# Altium PCB fpga.PcbDoc (part 6 of 6)
Units mm, origin at the board's own origin, x right, y up, seen from the top; angles counter-clockwise.
Board outline 111.63 x 111 mm, 2 copper layers (Top Layer, Bottom Layer); 5 components, 0 nets, 896 pads, 0 vias.
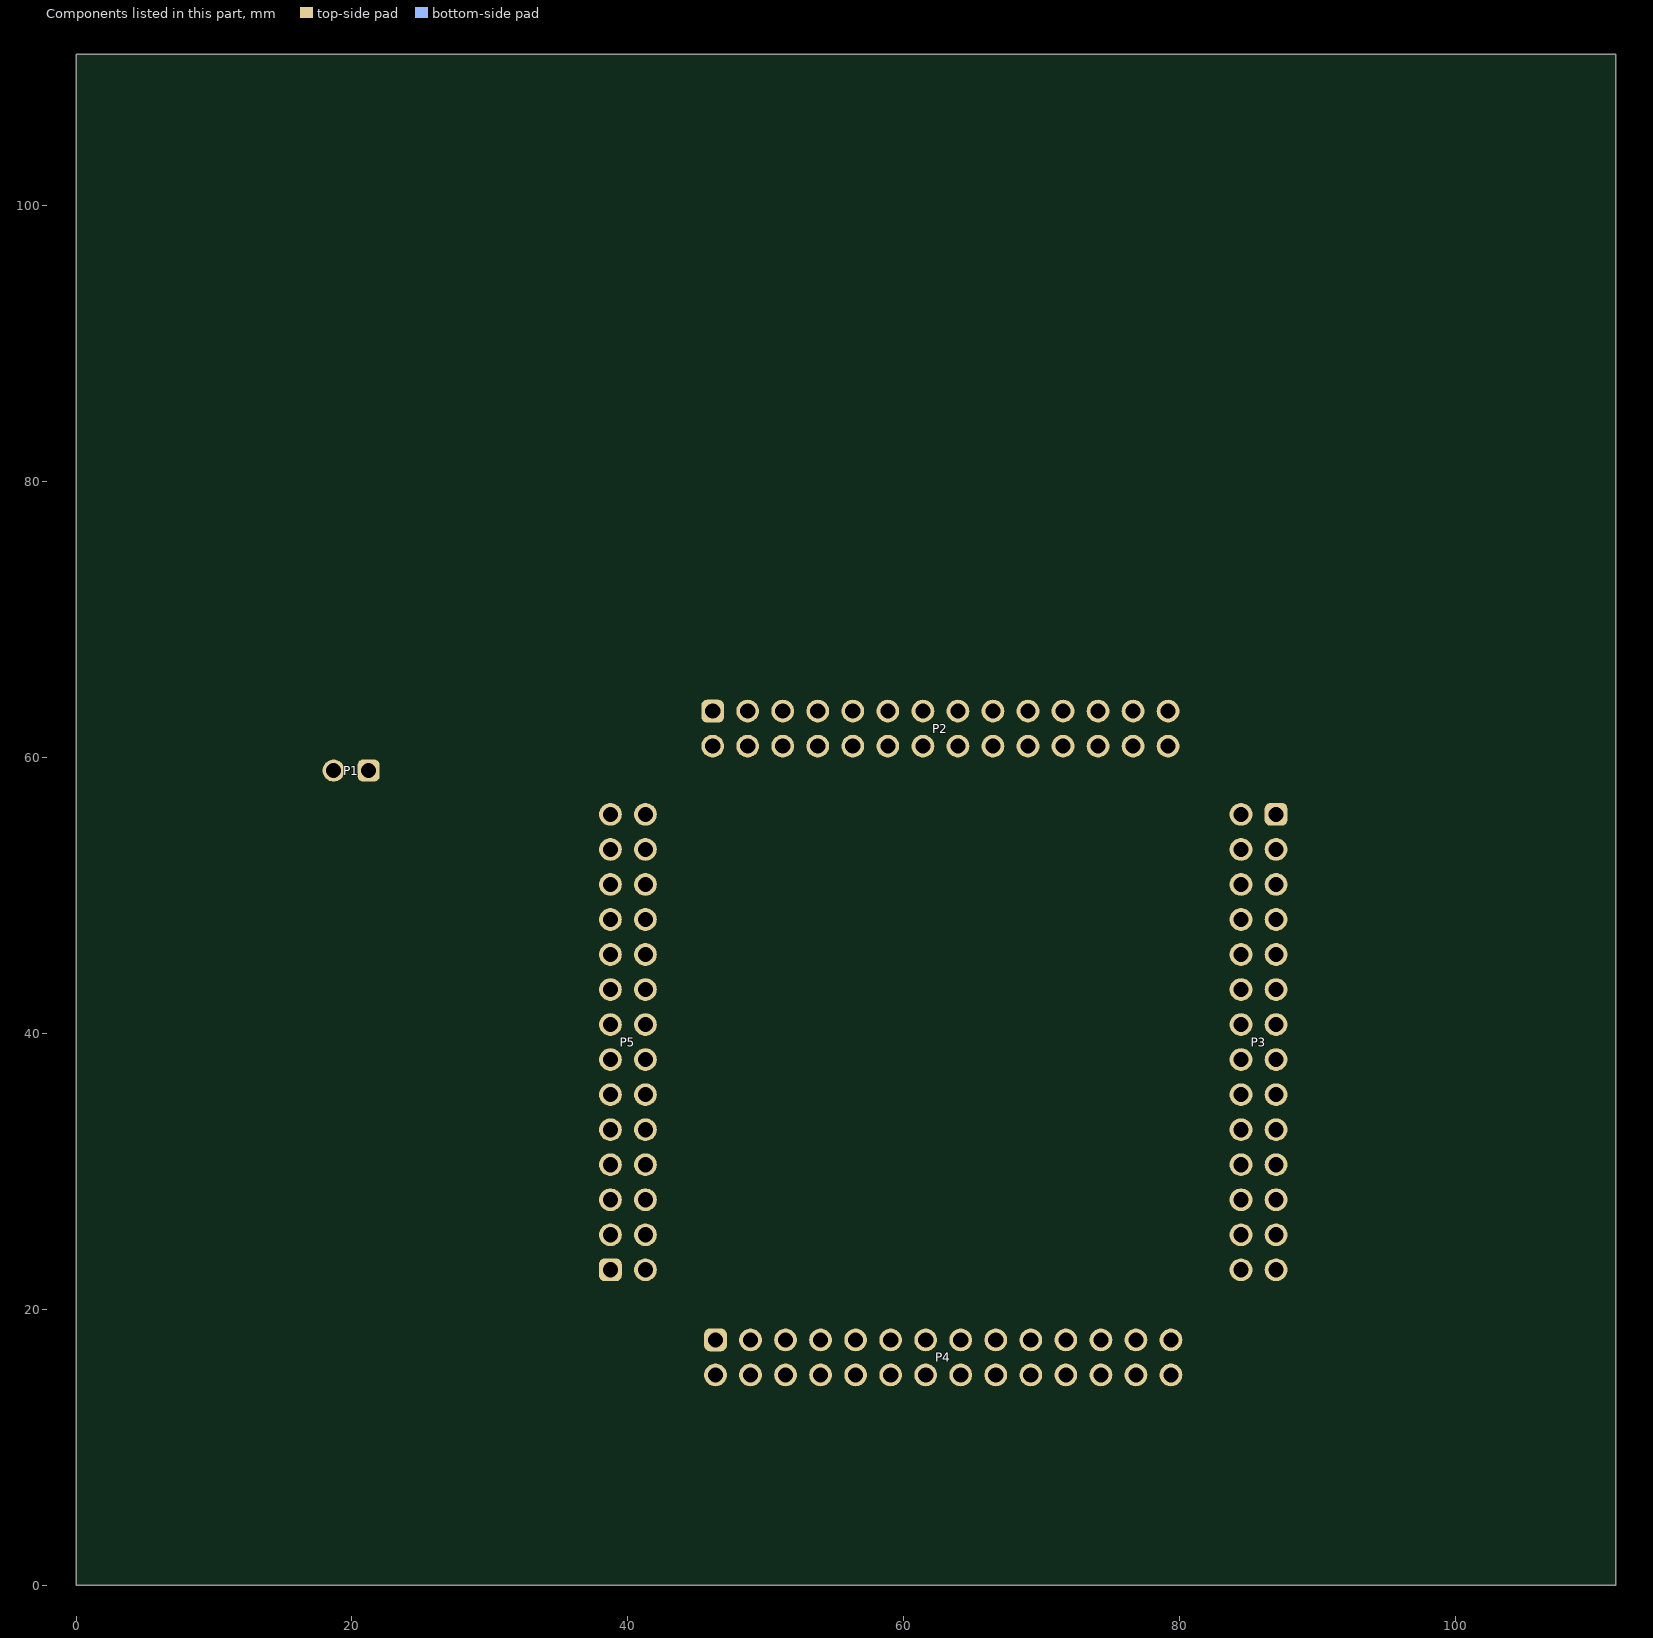
[diagram p6: the components of this part, seen from the top]

## Nets (pads, with @x,y where several pads share a name; then routed paths per layer and width w, separated by ;. In a path a pad name is that pad's centre, name@x,y a point inside that pad or via, vN(x,y) a via of type N, cw(c..) or ccw(c..) an arc to the next point about the centre after c; other vN are vias at no path point) (continued)
copper on no net: (continued)
  Top Layer w0.027: 14.647,22.595 14.672,22.57 ; 14.647,22.645 14.672,22.67 ; 14.647,22.645 14.672,22.62 ; 14.647,22.745 14.672,22.77 ; 14.647,22.745 14.672,22.72 ; 14.647,22.795 14.672,22.82 ; 14.647,22.795 14.672,22.77 ; 14.647,22.895 14.672,22.92 ; 14.647,22.895 14.672,22.87 ; 14.647,22.945 14.672,22.97 ; 14.647,22.945 14.672,22.92 ; 14.647,23.045 14.672,23.07 ; 14.647,23.045 14.672,23.02 ; 14.647,23.095 14.672,23.12 ; 14.647,23.095 14.672,23.07 ; 14.647,23.195 14.672,23.22 ; 14.647,23.195 14.672,23.17 ; 14.647,23.245 14.672,23.27 ; 14.647,23.245 14.672,23.22 ; 14.647,23.345 14.672,23.37 ; 14.647,23.345 14.672,23.32 ; 14.647,23.395 14.672,23.42 ; 14.647,23.395 14.672,23.37 ; 14.647,23.495 14.672,23.52 ; 14.647,23.495 14.672,23.47 ; 14.647,23.545 14.672,23.57 ; 14.647,23.545 14.672,23.52 ; 14.647,23.645 14.672,23.67 ; 14.647,23.645 14.672,23.62 ; 14.647,23.695 14.672,23.72 ; 14.647,23.695 14.672,23.67 ; 14.647,23.795 14.672,23.82 ; 14.647,23.795 14.672,23.77 ; 14.647,23.845 14.672,23.87 ; 14.647,23.845 14.672,23.82 ; 14.647,23.945 14.672,23.97 ; 14.647,23.945 14.672,23.92 ; 14.647,23.995 14.672,24.02 ; 14.647,23.995 14.672,23.97 ; 14.647,24.095 14.672,24.12 ; 14.647,24.095 14.672,24.07 ; 14.647,24.145 14.672,24.17 ; 14.647,24.145 14.672,24.12 ; 14.647,24.245 14.672,24.27 ; 14.647,24.245 14.672,24.22 ; 14.647,24.295 14.672,24.32 ; 14.647,24.295 14.672,24.27 ; 14.647,24.395 14.672,24.42 ; 14.647,24.395 14.672,24.37 ; 14.647,24.445 14.672,24.47 ; 14.647,24.445 14.672,24.42 ; 14.647,24.545 14.672,24.57 ; 14.647,24.545 14.672,24.52 ; 14.647,24.595 14.672,24.62 ; 14.647,24.595 14.672,24.57 ; 14.647,24.695 14.672,24.72 ; 14.647,24.695 14.672,24.67 ; 14.647,24.745 14.672,24.77 ; 14.647,24.745 14.672,24.72 ; 14.647,24.845 14.672,24.87 ; 14.647,24.845 14.672,24.82 ; 14.647,24.895 14.672,24.92 ; 14.647,24.895 14.672,24.87 ; 14.647,24.995 14.672,25.02 ; 14.647,24.995 14.672,24.97 ; 14.647,25.045 14.672,25.07 ; 14.647,25.045 14.672,25.02 ; 14.647,25.145 14.672,25.17 ; 14.647,25.145 14.672,25.12 ; 14.647,25.195 14.672,25.22 ; 14.647,25.195 14.672,25.17 ; 14.647,25.295 14.672,25.32 ; 14.647,25.295 14.672,25.27 ; 14.647,25.345 14.672,25.37 ; 14.647,25.345 14.672,25.32 ; 14.647,25.445 14.672,25.47 ; 14.647,25.445 14.672,25.42 ; 14.647,25.495 14.672,25.52 ; 14.647,25.495 14.672,25.47 ; 14.647,25.595 14.672,25.62 ; 14.647,25.595 14.672,25.57 ; 14.647,25.645 14.672,25.67 ; 14.647,25.645 14.672,25.62 ; 14.647,25.745 14.672,25.77 ; 14.647,25.745 14.672,25.72 ; 14.647,25.795 14.672,25.82 ; 14.647,25.795 14.672,25.77 ; 14.647,25.895 14.672,25.92 ; 14.647,25.895 14.672,25.87 ; 14.647,25.945 14.672,25.97 ; 14.647,25.945 14.672,25.92 ; 14.647,26.045 14.672,26.07 ; 14.647,26.045 14.672,26.02 ; 14.647,26.095 14.672,26.12 ; 14.647,26.095 14.672,26.07 ; 14.647,26.195 14.672,26.22 ; 14.647,26.195 14.672,26.17 ; 14.647,26.245 14.672,26.27 ; 14.647,26.245 14.672,26.22 ; 14.647,26.345 14.672,26.37 ; 14.647,26.345 14.672,26.32 ; 14.647,26.395 14.672,26.42 ; 14.647,26.395 14.672,26.37 ; 14.647,26.495 14.672,26.52 ; 14.647,26.495 14.672,26.47 ; 14.647,26.545 14.672,26.57 ; 14.647,26.545 14.672,26.52 ; 14.647,26.645 14.672,26.67 ; 14.647,26.645 14.672,26.62 ; 14.647,26.695 14.672,26.72 ; 14.647,26.695 14.672,26.67 ; 14.647,26.795 14.672,26.82 ; 14.647,26.795 14.672,26.77 ; 14.647,26.845 14.672,26.87 ; 14.647,26.845 14.672,26.82 ; 14.647,26.945 14.672,26.97 ; 14.647,26.945 14.672,26.92 ; 14.647,26.995 14.672,27.02 ; 14.647,26.995 14.672,26.97 ; 14.647,27.095 14.672,27.12 ; 14.647,27.095 14.672,27.07 ; 14.647,27.145 14.672,27.17 ; 14.647,27.145 14.672,27.12 ; 14.647,27.245 14.672,27.27 ; 14.647,27.245 14.672,27.22 ; 14.647,27.295 14.672,27.32 ; 14.647,27.295 14.672,27.27 ; 14.647,27.395 14.672,27.42 ; 14.647,27.395 14.672,27.37 ; 14.647,27.445 14.672,27.47 ; 14.647,27.445 14.672,27.42 ; 14.647,27.545 14.672,27.57 ; 14.647,27.545 14.672,27.52 ; 14.647,27.595 14.672,27.62 ; 14.647,27.595 14.672,27.57 ; 14.647,27.695 14.672,27.72 ; 14.647,27.695 14.672,27.67 ; 14.647,27.745 14.672,27.77 ; 14.647,27.745 14.672,27.72 ; 14.647,27.845 14.672,27.87 ; 14.647,27.845 14.672,27.82 ; 14.647,27.895 14.672,27.92 ; 14.647,27.895 14.672,27.87 ; 14.647,27.995 14.672,28.02 ; 14.647,27.995 14.672,27.97 ; 14.647,28.045 14.672,28.07 ; 14.647,28.045 14.672,28.02 ; 14.647,28.145 14.672,28.17 ; 14.647,28.145 14.672,28.12 ; 14.647,28.195 14.672,28.22 ; 14.647,28.195 14.672,28.17 ; 14.647,28.295 14.672,28.32 ; 14.647,28.295 14.672,28.27 ; 14.647,28.345 14.672,28.37 ; 14.647,28.345 14.672,28.32 ; 14.647,28.445 14.672,28.47 ; 14.647,28.445 14.672,28.42 ; 14.647,28.495 14.672,28.52 ; 14.647,28.495 14.672,28.47 ; 14.647,28.595 14.672,28.62 ; 14.647,28.595 14.672,28.57 ; 14.647,28.645 14.672,28.67 ; 14.647,28.645 14.672,28.62 ; 14.647,28.745 14.672,28.77 ; 14.647,28.745 14.672,28.72 ; 14.647,28.795 14.672,28.82 ; 14.647,28.795 14.672,28.77 ; 14.647,28.895 14.672,28.92 ; 14.647,28.895 14.672,28.87 ; 14.647,28.945 14.672,28.97 ; 14.647,28.945 14.672,28.92 ; 14.647,29.045 14.672,29.07 ; 14.647,29.045 14.672,29.02 ; 14.647,29.095 14.672,29.12 ; 14.647,29.095 14.672,29.07 ; 14.647,29.195 14.672,29.22 ; 14.647,29.195 14.672,29.17 ; 14.647,29.245 14.672,29.27 ; 14.647,29.245 14.672,29.22 ; 14.647,29.345 14.672,29.37 ; 14.647,29.345 14.672,29.32 ; 14.647,29.395 14.672,29.42 ; 14.647,29.395 14.672,29.37 ; 14.647,29.495 14.672,29.52 ; 14.647,29.495 14.672,29.47 ; 14.647,29.545 14.672,29.57 ; 14.647,29.545 14.672,29.52 ; 14.647,29.645 14.672,29.67 ; 14.647,29.645 14.672,29.62 ; 14.647,29.695 14.672,29.72 ; 14.647,29.695 14.672,29.67 ; 14.647,29.795 14.672,29.82 ; 14.647,29.795 14.672,29.77 ; 14.647,29.845 14.672,29.87 ; 14.647,29.845 14.672,29.82 ; 14.647,29.945 14.672,29.97 ; 14.647,29.945 14.672,29.92 ; 14.647,29.995 14.672,30.02 ; 14.647,29.995 14.672,29.97 ; 14.647,30.095 14.672,30.12 ; 14.647,30.095 14.672,30.07 ; 14.647,30.145 14.672,30.17 ; 14.647,30.145 14.672,30.12 ; 14.647,30.245 14.672,30.27 ; 14.647,30.245 14.672,30.22 ; 14.647,30.295 14.672,30.32 ; 14.647,30.295 14.672,30.27 ; 14.647,30.395 14.672,30.42 ; 14.647,30.395 14.672,30.37 ; 14.647,30.445 14.672,30.47 ; 14.647,30.445 14.672,30.42 ; 14.647,30.545 14.672,30.57 ; 14.647,30.545 14.672,30.52 ; 14.647,30.595 14.672,30.62 ; 14.647,30.595 14.672,30.57 ; 14.647,30.695 14.672,30.72 ; 14.647,30.695 14.672,30.67 ; 14.647,30.745 14.672,30.77 ; 14.647,30.745 14.672,30.72 ; 14.647,30.845 14.672,30.87 ; 14.647,30.845 14.672,30.82 ; 14.647,30.895 14.672,30.92 ; 14.647,30.895 14.672,30.87 ; 14.647,30.995 14.672,31.02 ; 14.647,30.995 14.672,30.97 ; 14.647,31.045 14.672,31.07 ; 14.647,31.045 14.672,31.02 ; 14.647,31.145 14.672,31.17 ; 14.647,31.145 14.672,31.12 ; 14.647,31.195 14.672,31.22 ; 14.647,31.195 14.672,31.17 ; 14.647,31.295 14.672,31.32 ; 14.647,31.295 14.672,31.27 ; 14.647,31.345 14.672,31.37 ; 14.647,31.345 14.672,31.32 ; 14.647,31.445 14.672,31.47 ; 14.647,31.445 14.672,31.42 ; 14.647,31.495 14.672,31.52 ; 14.647,31.495 14.672,31.47 ; 14.647,31.595 14.672,31.62 ; 14.647,31.595 14.672,31.57 ; 14.647,31.645 14.672,31.67 ; 14.647,31.645 14.672,31.62 ; 14.647,31.745 14.672,31.77 ; 14.647,31.745 14.672,31.72 ; 14.647,31.795 14.672,31.82 ; 14.647,31.795 14.672,31.77 ; 14.647,31.895 14.672,31.92 ; 14.647,31.895 14.672,31.87 ; 14.647,31.945 14.672,31.97 ; 14.647,31.945 14.672,31.92 ; 14.647,32.045 14.672,32.07 ; 14.647,32.045 14.672,32.02 ; 14.647,32.095 14.672,32.12 ; 14.647,32.095 14.672,32.07 ; 14.647,32.195 14.672,32.22 ; 14.647,32.195 14.672,32.17 ; 14.647,32.245 14.672,32.27 ; 14.647,32.245 14.672,32.22 ; 14.647,32.345 14.672,32.37 ; 14.647,32.345 14.672,32.32 ; 14.647,32.395 14.672,32.42 ; 14.647,32.395 14.672,32.37 ; 14.647,32.495 14.672,32.52 ; 14.647,32.495 14.672,32.47 ; 14.647,32.545 14.672,32.57 ; 14.647,32.545 14.672,32.52 ; 14.647,32.645 14.672,32.67 ; 14.647,32.645 14.672,32.62 ; 14.647,32.695 14.672,32.72 ; 14.647,32.695 14.672,32.67 ; 14.647,32.795 14.672,32.82 ; 14.647,32.795 14.672,32.77 ; 14.647,32.845 14.672,32.87 ; 14.647,32.845 14.672,32.82 ; 14.647,32.945 14.672,32.97 ; 14.647,32.945 14.672,32.92 ; 14.647,32.995 14.672,33.02 ; 14.647,32.995 14.672,32.97 ; 14.647,33.095 14.672,33.12 ; 14.647,33.095 14.672,33.07 ; 14.647,33.145 14.672,33.17 ; 14.647,33.145 14.672,33.12 ; 14.647,33.245 14.672,33.27 ; 14.647,33.245 14.672,33.22 ; 14.647,33.295 14.672,33.32 ; 14.647,33.295 14.672,33.27 ; 14.647,33.395 14.672,33.42 ; 14.647,33.395 14.672,33.37 ; 14.647,33.445 14.672,33.47 ; 14.647,33.445 14.672,33.42 ; 14.647,33.545 14.672,33.57 ; 14.647,33.545 14.672,33.52 ; 14.647,33.595 14.672,33.62 ; 14.647,33.595 14.672,33.57 ; 14.647,33.695 14.672,33.72 ; 14.647,33.695 14.672,33.67 ; 14.647,33.745 14.672,33.77 ; 14.647,33.745 14.672,33.72 ; 14.647,33.845 14.672,33.87 ; 14.647,33.845 14.672,33.82 ; 14.647,33.895 14.672,33.92 ; 14.647,33.895 14.672,33.87 ; 14.647,33.995 14.672,34.02 ; 14.647,33.995 14.672,33.97 ; 14.647,34.045 14.672,34.07 ; 14.647,34.045 14.672,34.02 ; 14.647,34.145 14.672,34.17 ; 14.647,34.145 14.672,34.12 ; 14.647,34.195 14.672,34.22 ; 14.647,34.195 14.672,34.17 ; 14.647,34.295 14.672,34.32 ; 14.647,34.295 14.672,34.27 ; 14.647,34.345 14.672,34.37 ; 14.647,34.345 14.672,34.32 ; 14.647,34.445 14.672,34.47 ; 14.647,34.445 14.672,34.42 ; 14.647,34.495 14.672,34.52 ; 14.647,34.495 14.672,34.47 ; 14.647,34.595 14.672,34.62 ; 14.647,34.595 14.672,34.57 ; 14.647,34.645 14.672,34.67 ; 14.647,34.645 14.672,34.62 ; 14.647,34.745 14.672,34.77 ; 14.647,34.745 14.672,34.72 ; 14.647,34.795 14.672,34.82 ; 14.647,34.795 14.672,34.77 ; 14.647,34.895 14.672,34.92 ; 14.647,34.895 14.672,34.87 ; 14.647,34.945 14.672,34.97 ; 14.647,34.945 14.672,34.92 ; 14.647,35.045 14.672,35.07 ; 14.647,35.045 14.672,35.02 ; 14.647,35.095 14.672,35.12 ; 14.647,35.095 14.672,35.07 ; 14.647,35.195 14.672,35.22 ; 14.647,35.195 14.672,35.17 ; 14.647,35.245 14.672,35.27 ; 14.647,35.245 14.672,35.22 ; 14.647,35.345 14.672,35.37 ; 14.647,35.345 14.672,35.32 ; 14.647,35.395 14.672,35.42 ; 14.647,35.395 14.672,35.37 ; 14.647,35.495 14.672,35.52 ; 14.647,35.495 14.672,35.47 ; 14.647,35.545 14.672,35.57 ; 14.647,35.545 14.672,35.52 ; 14.647,35.645 14.672,35.67 ; 14.647,35.645 14.672,35.62 ; 14.647,35.695 14.672,35.72 ; 14.647,35.695 14.672,35.67 ; 14.647,35.795 14.672,35.82 ; 14.647,35.795 14.672,35.77 ; 14.647,35.845 14.672,35.87 ; 14.647,35.845 14.672,35.82 ; 14.647,35.945 14.672,35.97 ; 14.647,35.945 14.672,35.92 ; 14.647,35.995 14.672,36.02 ; 14.647,35.995 14.672,35.97 ; 14.647,36.095 14.672,36.12 ; 14.647,36.095 14.672,36.07 ; 14.647,36.145 14.672,36.17 ; 14.647,36.145 14.672,36.12 ; 14.647,36.245 14.672,36.27 ; 14.647,36.245 14.672,36.22 ; 14.647,36.295 14.672,36.32 ; 14.647,36.295 14.672,36.27 ; 14.647,36.395 14.672,36.42 ; 14.647,36.395 14.672,36.37 ; 14.647,36.445 14.672,36.47 ; 14.647,36.445 14.672,36.42 ; 14.647,36.545 14.672,36.57 ; 14.647,36.545 14.672,36.52 ; 14.647,36.595 14.672,36.62 ; 14.647,36.595 14.672,36.57 ; 14.647,36.695 14.672,36.72 ; 14.647,36.695 14.672,36.67 ; 14.647,36.745 14.672,36.77 ; 14.647,36.745 14.672,36.72 ; 14.647,36.845 14.672,36.87 ; 14.647,36.845 14.672,36.82 ; 14.647,36.895 14.672,36.92 ; 14.647,36.895 14.672,36.87 ; 14.647,36.995 14.672,37.02 ; 14.647,36.995 14.672,36.97 ; 14.647,37.045 14.672,37.07 ; 14.647,37.045 14.672,37.02 ; 14.647,37.145 14.672,37.17 ; 14.647,37.145 14.672,37.12 ; 14.647,37.195 14.672,37.22 ; 14.647,37.195 14.672,37.17 ; 14.647,37.295 14.672,37.32 ; 14.647,37.295 14.672,37.27 ; 14.647,37.345 14.672,37.37 ; 14.647,37.345 14.672,37.32 ; 14.647,37.445 14.672,37.47 ; 14.647,37.445 14.672,37.42 ; 14.647,37.495 14.672,37.52 ; 14.647,37.495 14.672,37.47 ; 14.647,37.595 14.672,37.62 ; 14.647,37.595 14.672,37.57 ; 14.647,37.645 14.672,37.67 ; 14.647,37.645 14.672,37.62 ; 14.647,37.745 14.672,37.77 ; 14.647,37.745 14.672,37.72 ; 14.647,37.795 14.672,37.82 ; 14.647,37.795 14.672,37.77 ; 14.647,37.895 14.672,37.92 ; 14.647,37.895 14.672,37.87 ; 14.647,37.945 14.672,37.97 ; 14.647,37.945 14.672,37.92 ; 14.647,38.045 14.672,38.07 ; 14.647,38.045 14.672,38.02 ; 14.647,38.095 14.672,38.12 ; 14.647,38.095 14.672,38.07 ; 14.647,38.195 14.672,38.22 ; 14.647,38.195 14.672,38.17 ; 14.647,38.245 14.672,38.27 ; 14.647,38.245 14.672,38.22 ; 14.647,38.345 14.672,38.37 ; 14.647,38.345 14.672,38.32 ; 14.647,38.395 14.672,38.42 ; 14.647,38.395 14.672,38.37 ; 14.647,38.495 14.672,38.52 ; 14.647,38.495 14.672,38.47 ; 14.647,38.545 14.672,38.57 ; 14.647,38.545 14.672,38.52 ; 14.647,38.645 14.672,38.67 ; 14.647,38.645 14.672,38.62 ; 14.647,38.695 14.672,38.72 ; 14.647,38.695 14.672,38.67 ; 14.647,38.795 14.672,38.82 ; 14.647,38.795 14.672,38.77 ; 14.647,38.845 14.672,38.87 ; 14.647,38.845 14.672,38.82 ; 14.647,38.945 14.672,38.97 ; 14.647,38.945 14.672,38.92 ; 14.647,38.995 14.672,39.02 ; 14.647,38.995 14.672,38.97 ; 14.647,39.095 14.672,39.12 ; 14.647,39.095 14.672,39.07 ; 14.647,39.145 14.672,39.17 ; 14.647,39.145 14.672,39.12 ; 14.647,39.245 14.672,39.27 ; 14.647,39.245 14.672,39.22 ; 14.647,39.295 14.672,39.32 ; 14.647,39.295 14.672,39.27 ; 14.647,39.395 14.672,39.42 ; 14.647,39.395 14.672,39.37 ; 14.647,39.445 14.672,39.47 ; 14.647,39.445 14.672,39.42 ; 14.647,39.545 14.672,39.57 ; 14.647,39.545 14.672,39.52 ; 14.647,39.595 14.672,39.62 ; 14.647,39.595 14.672,39.57 ; 14.647,39.695 14.672,39.72 ; 14.647,39.695 14.672,39.67 ; 14.647,39.745 14.672,39.77 ; 14.647,39.745 14.672,39.72 ; 14.647,39.845 14.672,39.87 ; 14.647,39.845 14.672,39.82 ; 14.647,39.895 14.672,39.92 ; 14.647,39.895 14.672,39.87 ; 14.647,39.995 14.672,40.02 ; 14.647,39.995 14.672,39.97 ; 14.647,40.045 14.672,40.07 ; 14.647,40.045 14.672,40.02 ; 14.647,40.145 14.672,40.17 ; 14.647,40.145 14.672,40.12 ; 14.647,40.195 14.672,40.22 ; 14.647,40.195 14.672,40.17 ; 14.647,40.295 14.672,40.32 ; 14.647,40.295 14.672,40.27 ; 14.647,40.345 14.672,40.37 ; 14.647,40.345 14.672,40.32 ; 14.647,40.445 14.672,40.47 ; 14.647,40.445 14.672,40.42 ; 14.647,40.495 14.672,40.52 ; 14.647,40.495 14.672,40.47 ; 14.647,40.595 14.672,40.62 ; 14.647,40.595 14.672,40.57 ; 14.647,40.645 14.672,40.67 ; 14.647,40.645 14.672,40.62 ; 14.647,40.745 14.672,40.77 ; 14.647,40.745 14.672,40.72 ; 14.647,40.795 14.672,40.82 ; 14.647,40.795 14.672,40.77 ; 14.647,40.895 14.672,40.92 ; 14.647,40.895 14.672,40.87 ; 14.647,40.945 14.672,40.97 ; 14.647,40.945 14.672,40.92 ; 14.647,41.045 14.672,41.07 ; 14.647,41.045 14.672,41.02 ; 14.647,41.095 14.672,41.12 ; 14.647,41.095 14.672,41.07 ; 14.647,41.195 14.672,41.22 ; 14.647,41.195 14.672,41.17 ; 14.647,41.245 14.672,41.27 ; 14.647,41.245 14.672,41.22 ; 14.647,41.345 14.672,41.37 ; 14.647,41.345 14.672,41.32 ; 14.647,41.395 14.672,41.42 ; 14.647,41.395 14.672,41.37 ; 14.647,41.495 14.672,41.52 ; 14.647,41.495 14.672,41.47 ; 14.647,41.545 14.672,41.57 ; 14.647,41.545 14.672,41.52 ; 14.647,41.645 14.672,41.67 ; 14.647,41.645 14.672,41.62 ; 14.647,41.695 14.672,41.72 ; 14.647,41.695 14.672,41.67 ; 14.647,41.795 14.672,41.82 ; 14.647,41.795 14.672,41.77 ; 14.647,41.845 14.672,41.87 ; 14.647,41.845 14.672,41.82 ; 14.647,41.945 14.672,41.97 ; 14.647,41.945 14.672,41.92 ; 14.647,41.995 14.672,42.02 ; 14.647,41.995 14.672,41.97 ; 14.647,42.095 14.672,42.12 ; 14.647,42.095 14.672,42.07 ; 14.647,42.145 14.672,42.17 ; 14.647,42.145 14.672,42.12 ; 14.647,42.245 14.672,42.27 ; 14.647,42.245 14.672,42.22 ; 14.647,42.295 14.672,42.32 ; 14.647,42.295 14.672,42.27 ; 14.647,42.395 14.672,42.42 ; 14.647,42.395 14.672,42.37 ; 14.647,42.445 14.672,42.47 ; 14.647,42.445 14.672,42.42 ; 14.647,42.545 14.672,42.57 ; 14.647,42.545 14.672,42.52 ; 14.647,42.595 14.672,42.62 ; 14.647,42.595 14.672,42.57 ; 14.647,42.695 14.672,42.72 ; 14.647,42.695 14.672,42.67 ; 14.647,42.745 14.672,42.77 ; 14.647,42.745 14.672,42.72 ; 14.647,42.845 14.672,42.87 ; 14.647,42.845 14.672,42.82 ; 14.647,42.895 14.672,42.92 ; 14.647,42.895 14.672,42.87 ; 14.647,42.995 14.672,43.02 ; 14.647,42.995 14.672,42.97 ; 14.647,43.045 14.672,43.07 ; 14.647,43.045 14.672,43.02 ; 14.647,43.145 14.672,43.17 ; 14.647,43.145 14.672,43.12 ; 14.647,43.195 14.672,43.22 ; 14.647,43.195 14.672,43.17 ; 14.647,43.295 14.672,43.32 ; 14.647,43.295 14.672,43.27 ; 14.647,43.345 14.672,43.37 ; 14.647,43.345 14.672,43.32 ; 14.647,43.445 14.672,43.47 ; 14.647,43.445 14.672,43.42 ; 14.647,43.495 14.672,43.52 ; 14.647,43.495 14.672,43.47 ; 14.647,43.595 14.672,43.62 ; 14.647,43.595 14.672,43.57 ; 14.647,43.645 14.672,43.67 ; 14.647,43.645 14.672,43.62 ; 14.647,43.745 14.672,43.77 ; 14.647,43.745 14.672,43.72 ; 14.647,43.795 14.672,43.82 ; 14.647,43.795 14.672,43.77 ; 14.647,43.895 14.672,43.92 ; 14.647,43.895 14.672,43.87 ; 14.647,43.945 14.672,43.97 ; 14.647,43.945 14.672,43.92 ; 14.647,44.045 14.672,44.07 ; 14.647,44.045 14.672,44.02 ; 14.647,44.095 14.672,44.12 ; 14.647,44.095 14.672,44.07 ; 14.647,44.195 14.672,44.22 ; 14.647,44.195 14.672,44.17 ; 14.647,44.245 14.672,44.27 ; 14.647,44.245 14.672,44.22 ; 14.647,44.345 14.672,44.37 ; 14.647,44.345 14.672,44.32 ; 14.647,44.395 14.672,44.42 ; 14.647,44.395 14.672,44.37 ; 14.647,44.495 14.672,44.52 ; 14.647,44.495 14.672,44.47 ; 14.647,44.545 14.672,44.57 ; 14.647,44.545 14.672,44.52 ; 14.647,44.645 14.672,44.67 ; 14.647,44.645 14.672,44.62 ; 14.647,44.695 14.672,44.72 ; 14.647,44.695 14.672,44.67 ; 14.647,44.795 14.672,44.82 ; 14.647,44.795 14.672,44.77 ; 14.647,44.845 14.672,44.87 ; 14.647,44.845 14.672,44.82 ; 14.647,44.945 14.672,44.97 ; 14.647,44.945 14.672,44.92 ; 14.647,44.995 14.672,45.02 ; 14.647,44.995 14.672,44.97 ; 14.647,45.095 14.672,45.12 ; 14.647,45.095 14.672,45.07 ; 14.647,45.145 14.672,45.12 ; 14.672,21.32 14.647,21.345 14.672,21.37 ; 14.672,21.47 14.647,21.495 14.672,21.52 ; 14.672,21.62 14.647,21.645 14.672,21.67 ; 14.672,21.77 14.647,21.795 14.672,21.82 ; 14.672,21.92 14.647,21.945 14.672,21.97 ; 14.672,22.07 14.647,22.095 14.672,22.12 ; 14.672,22.22 14.647,22.245 14.672,22.27 ; 14.672,22.37 14.647,22.395 14.672,22.42 ; 14.672,22.52 14.647,22.545 14.672,22.57 ; 14.672,22.67 14.647,22.695 14.672,22.72 ; 14.672,22.82 14.647,22.845 14.672,22.87 ; 14.672,22.97 14.647,22.995 14.672,23.02 ; 14.672,23.12 14.647,23.145 14.672,23.17 ; 14.672,23.27 14.647,23.295 14.672,23.32 ; 14.672,23.42 14.647,23.445 14.672,23.47 ; 14.672,23.57 14.647,23.595 14.672,23.62 ; 14.672,23.72 14.647,23.745 14.672,23.77 ; 14.672,23.87 14.647,23.895 14.672,23.92 ; 14.672,24.02 14.647,24.045 14.672,24.07 ; 14.672,24.17 14.647,24.195 14.672,24.22 ; 14.672,24.32 14.647,24.345 14.672,24.37 ; 14.672,24.47 14.647,24.495 14.672,24.52 ; 14.672,24.62 14.647,24.645 14.672,24.67 ; 14.672,24.77 14.647,24.795 14.672,24.82 ; 14.672,24.92 14.647,24.945 14.672,24.97 ; 14.672,25.07 14.647,25.095 14.672,25.12 ; 14.672,25.22 14.647,25.245 14.672,25.27 ; 14.672,25.37 14.647,25.395 14.672,25.42 ; 14.672,25.52 14.647,25.545 14.672,25.57 ; 14.672,25.67 14.647,25.695 14.672,25.72 ; 14.672,25.82 14.647,25.845 14.672,25.87 ; 14.672,25.97 14.647,25.995 14.672,26.02 ; 14.672,26.12 14.647,26.145 14.672,26.17 ; 14.672,26.27 14.647,26.295 14.672,26.32 ; 14.672,26.42 14.647,26.445 14.672,26.47 ; 14.672,26.57 14.647,26.595 14.672,26.62 ; 14.672,26.72 14.647,26.745 14.672,26.77 ; 14.672,26.87 14.647,26.895 14.672,26.92 ; 14.672,27.02 14.647,27.045 14.672,27.07 ; 14.672,27.17 14.647,27.195 14.672,27.22 ; 14.672,27.32 14.647,27.345 14.672,27.37 ; 14.672,27.47 14.647,27.495 14.672,27.52 ; 14.672,27.62 14.647,27.645 14.672,27.67 ; 14.672,27.77 14.647,27.795 14.672,27.82 ; 14.672,27.92 14.647,27.945 14.672,27.97 ; 14.672,28.07 14.647,28.095 14.672,28.12 ; 14.672,28.22 14.647,28.245 14.672,28.27 ; 14.672,28.37 14.647,28.395 14.672,28.42 ; 14.672,28.52 14.647,28.545 14.672,28.57 ; 14.672,28.67 14.647,28.695 14.672,28.72 ; 14.672,28.82 14.647,28.845 14.672,28.87 ; 14.672,28.97 14.647,28.995 14.672,29.02 ; 14.672,29.12 14.647,29.145 14.672,29.17 ; 14.672,29.27 14.647,29.295 14.672,29.32 ; 14.672,29.42 14.647,29.445 14.672,29.47 ; 14.672,29.57 14.647,29.595 14.672,29.62 ; 14.672,29.72 14.647,29.745 14.672,29.77 ; 14.672,29.87 14.647,29.895 14.672,29.92 ; 14.672,30.02 14.647,30.045 14.672,30.07 ; 14.672,30.17 14.647,30.195 14.672,30.22 ; 14.672,30.32 14.647,30.345 14.672,30.37 ; 14.672,30.47 14.647,30.495 14.672,30.52 ; 14.672,30.62 14.647,30.645 14.672,30.67 ; 14.672,30.77 14.647,30.795 14.672,30.82 ; 14.672,30.92 14.647,30.945 14.672,30.97 ; 14.672,31.07 14.647,31.095 14.672,31.12 ; 14.672,31.22 14.647,31.245 14.672,31.27 ; 14.672,31.37 14.647,31.395 14.672,31.42 ; 14.672,31.52 14.647,31.545 14.672,31.57 ; 14.672,31.67 14.647,31.695 14.672,31.72 ; 14.672,31.82 14.647,31.845 14.672,31.87 ; 14.672,31.97 14.647,31.995 14.672,32.02 ; 14.672,32.12 14.647,32.145 14.672,32.17 ; 14.672,32.27 14.647,32.295 14.672,32.32 ; 14.672,32.42 14.647,32.445 14.672,32.47 ; 14.672,32.57 14.647,32.595 14.672,32.62 ; 14.672,32.72 14.647,32.745 14.672,32.77 ; 14.672,32.87 14.647,32.895 14.672,32.92 ; 14.672,33.02 14.647,33.045 14.672,33.07 ; 14.672,33.17 14.647,33.195 14.672,33.22 ; 14.672,33.32 14.647,33.345 14.672,33.37 ; 14.672,33.47 14.647,33.495 14.672,33.52 ; 14.672,33.62 14.647,33.645 14.672,33.67 ; 14.672,33.77 14.647,33.795 14.672,33.82 ; 14.672,33.92 14.647,33.945 14.672,33.97 ; 14.672,34.07 14.647,34.095 14.672,34.12 ; 14.672,34.22 14.647,34.245 14.672,34.27 ; 14.672,34.37 14.647,34.395 14.672,34.42 ; 14.672,34.52 14.647,34.545 14.672,34.57 ; 14.672,34.67 14.647,34.695 14.672,34.72 ; 14.672,34.82 14.647,34.845 14.672,34.87 ; 14.672,34.97 14.647,34.995 14.672,35.02 ; 14.672,35.12 14.647,35.145 14.672,35.17 ; 14.672,35.27 14.647,35.295 14.672,35.32 ; 14.672,35.42 14.647,35.445 14.672,35.47 ; 14.672,35.57 14.647,35.595 14.672,35.62 ; 14.672,35.72 14.647,35.745 14.672,35.77 ; 14.672,35.87 14.647,35.895 14.672,35.92 ; 14.672,36.02 14.647,36.045 14.672,36.07 ; 14.672,36.17 14.647,36.195 14.672,36.22 ; 14.672,36.32 14.647,36.345 14.672,36.37 ; 14.672,36.47 14.647,36.495 14.672,36.52 ; 14.672,36.62 14.647,36.645 14.672,36.67 ; 14.672,36.77 14.647,36.795 14.672,36.82 ; 14.672,36.92 14.647,36.945 14.672,36.97 ; 14.672,37.07 14.647,37.095 14.672,37.12 ; 14.672,37.22 14.647,37.245 14.672,37.27 ; 14.672,37.37 14.647,37.395 14.672,37.42 ; 14.672,37.52 14.647,37.545 14.672,37.57 ; 14.672,37.67 14.647,37.695 14.672,37.72 ; 14.672,37.82 14.647,37.845 14.672,37.87 ; 14.672,37.97 14.647,37.995 14.672,38.02 ; 14.672,38.12 14.647,38.145 14.672,38.17 ; 14.672,38.27 14.647,38.295 14.672,38.32 ; 14.672,38.42 14.647,38.445 14.672,38.47 ; 14.672,38.57 14.647,38.595 14.672,38.62 ; 14.672,38.72 14.647,38.745 14.672,38.77 ; 14.672,38.87 14.647,38.895 14.672,38.92 ; 14.672,39.02 14.647,39.045 14.672,39.07 ; 14.672,39.17 14.647,39.195 14.672,39.22 ; 14.672,39.32 14.647,39.345 14.672,39.37 ; 14.672,39.47 14.647,39.495 14.672,39.52 ; 14.672,39.62 14.647,39.645 14.672,39.67 ; 14.672,39.77 14.647,39.795 14.672,39.82 ; 14.672,39.92 14.647,39.945 14.672,39.97 ; 14.672,40.07 14.647,40.095 14.672,40.12 ; 14.672,40.22 14.647,40.245 14.672,40.27 ; 14.672,40.37 14.647,40.395 14.672,40.42 ; 14.672,40.52 14.647,40.545 14.672,40.57 ; 14.672,40.67 14.647,40.695 14.672,40.72 ; 14.672,40.82 14.647,40.845 14.672,40.87 ; 14.672,40.97 14.647,40.995 14.672,41.02 ; 14.672,41.12 14.647,41.145 14.672,41.17 ; 14.672,41.27 14.647,41.295 14.672,41.32 ; 14.672,41.42 14.647,41.445 14.672,41.47 ; 14.672,41.57 14.647,41.595 14.672,41.62 ; 14.672,41.72 14.647,41.745 14.672,41.77 ; 14.672,41.87 14.647,41.895 14.672,41.92 ; 14.672,42.02 14.647,42.045 14.672,42.07 ; 14.672,42.17 14.647,42.195 14.672,42.22 ; 14.672,42.32 14.647,42.345 14.672,42.37 ; 14.672,42.47 14.647,42.495 14.672,42.52 ; 14.672,42.62 14.647,42.645 14.672,42.67 ; 14.672,42.77 14.647,42.795 14.672,42.82 ; 14.672,42.92 14.647,42.945 14.672,42.97 ; 14.672,43.07 14.647,43.095 14.672,43.12 ; 14.672,43.22 14.647,43.245 14.672,43.27 ; 14.672,43.37 14.647,43.395 14.672,43.42 ; 14.672,43.52 14.647,43.545 14.672,43.57 ; 14.672,43.67 14.647,43.695 14.672,43.72 ; 14.672,43.82 14.647,43.845 14.672,43.87 ; 14.672,43.97 14.647,43.995 14.672,44.02 ; 14.672,44.12 14.647,44.145 14.672,44.17 ; 14.672,44.27 14.647,44.295 14.672,44.32 ; 14.672,44.42 14.647,44.445 14.672,44.47 ; 14.672,44.57 14.647,44.595 14.672,44.62 ; 14.672,44.72 14.647,44.745 14.672,44.77 ; 14.672,44.87 14.647,44.895 14.672,44.92 ; 14.672,45.02 14.647,45.045 14.672,45.07
  Top Layer w0.165: 1,102 1,103.2 1.55,103.8 2.1,103.2 2.1,102 ; 1,102.6 2.1,102.6 ; 2.43,102 2.43,103.8 ; 2.43,102.6 3.255,103.5 ; 2.842,103.05 3.53,102 ; 3.86,103.05 4.41,103.05 ; 3.86,103.8 3.86,102.3 4.135,102 4.96,102 ; 5.29,103.05 5.29,102.3 5.565,102 6.115,102 6.39,102.3 ; 6.39,102 6.39,103.05 ; 6.72,102.6 7.545,102.6 7.82,102.75 7.82,102.9 7.545,103.05 6.995,103.05 6.72,102.75 6.72,102.3 6.995,102 7.545,102 7.82,102.15 ; 8.15,102 9.25,102 ; 8.425,103.8 8.7,103.8 8.7,102 ; 9.58,102 10.68,102 ; 9.855,103.8 10.13,103.8 10.13,102 ; 11.01,102.6 11.835,102.6 12.11,102.75 12.11,102.9 11.835,103.05 11.285,103.05 11.01,102.75 11.01,102.3 11.285,102 11.835,102 12.11,102.15 ; 12.44,102 13.402,102 13.54,102.3 13.402,102.6 12.577,102.6 12.44,102.9 12.577,103.05 13.54,103.05 ; 15.3,102 15.3,103.8 15.987,103.8 16.262,103.65 16.4,103.35 16.262,103.05 15.987,102.9 15.3,102.9 ; 16.73,102 16.73,103.05 ; 16.73,102.6 17.142,103.05 17.83,103.05 ; 19.59,101.4 20.415,101.4 20.69,101.7 20.69,103.05 20.277,103.05 ; 20.69,103.65 20.69,103.8 ; 21.02,102.6 21.845,102.6 22.12,102.75 22.12,102.9 21.845,103.05 21.295,103.05 21.02,102.75 21.02,102.3 21.295,102 21.845,102 22.12,102.15 ; 22.45,102 22.45,103.8 ; 22.45,102.6 23.275,103.5 ; 22.862,103.05 23.55,102 ; 23.88,103.05 24.43,103.05 ; 23.88,103.8 23.88,102.3 24.155,102 24.98,102 ; 26.74,103.05 27.29,102 27.84,103.05 ; 29.6,102 29.6,103.05 ; 29.6,102.75 29.875,103.05 30.425,103.05 30.7,102.75 30.7,102 ; 32.46,103.8 33.56,103.8 ; 33.01,102 33.01,103.8 ; 33.89,102 33.89,103.2 34.44,103.8 34.99,103.2 34.99,102 ; 33.89,102.6 34.99,102.6 ; 35.32,102 35.32,103.8 36.007,103.8 36.282,103.65 36.42,103.35 36.282,103.05 36.007,102.9 35.32,102.9 ; 35.87,102.9 36.42,102 ; 37.575,102.9 37.85,102.9 37.85,102.45 37.712,102.15 37.437,102 37.162,102 36.887,102.15 36.75,102.45 36.75,103.35 36.887,103.65 37.162,103.8 37.437,103.8 37.712,103.65 ; 38.18,102.9 38.73,102.9 ; 39.28,102 38.18,102 38.18,103.8 39.28,103.8 ; 39.61,103.8 40.71,103.8 ; 40.16,102 40.16,103.8 ; 42.47,102 42.47,103.8 43.57,102 43.57,103.8 ; 45,102.45 44.862,102.15 44.587,102 44.312,102 44.037,102.15 43.9,102.45 43.9,103.35 44.037,103.65 44.312,103.8 44.587,103.8 44.862,103.65 45,103.35 ; 45.33,102.9 46.43,102.9 ; 46.76,102.9 47.31,102.9 ; 47.86,102 46.76,102 46.76,103.8 47.86,103.8 ; 49.29,103.05 48.465,103.05 48.19,102.75 48.19,102.3 48.465,102 49.29,102 49.29,103.8 ; 49.62,102 50.72,102 ; 49.757,103.05 50.17,103.05 50.17,102 ; 50.17,103.65 50.17,103.8 ; 51.05,103.05 51.6,103.05 ; 51.05,103.8 51.05,102.3 51.325,102 52.15,102 ; 52.48,102 53.58,102 ; 52.617,103.05 53.03,103.05 53.03,102 ; 53.03,103.65 53.03,103.8 ; 55.34,102 55.34,103.05 ; 55.34,102.75 55.615,103.05 56.165,103.05 56.44,102.75 56.44,102 ; 59.63,102 59.63,103.8 ; 59.63,102.6 60.73,103.8 ; 60.042,103.05 60.73,102 ; 62.49,102 62.49,103.05 63.315,103.05 63.59,102.75 63.59,102 ; 62.765,103.05 63.04,102.75 63.04,102 ; 63.92,102 63.92,103.05 64.745,103.05 65.02,102.75 65.02,102 ; 64.195,103.05 64.47,102.75 64.47,102 ; 65.35,102.6 66.175,102.6 66.45,102.75 66.45,102.9 66.175,103.05 65.625,103.05 65.35,102.75 65.35,102.3 65.625,102 66.175,102 66.45,102.15 ; 66.78,102 66.78,103.05 ; 66.78,102.6 67.192,103.05 67.88,103.05 ; 68.21,103.05 69.31,103.05 68.21,102 69.31,102 ; 69.64,102 70.74,102 ; 69.777,103.05 70.19,103.05 70.19,102 ; 70.19,103.65 70.19,103.8 ; 71.07,102.6 71.895,102.6 72.17,102.75 72.17,102.9 71.895,103.05 71.345,103.05 71.07,102.75 71.07,102.3 71.345,102 71.895,102 72.17,102.15 ; 72.5,102 73.6,102 ; 72.775,103.8 73.05,103.8 73.05,102 ; 73.93,102 75.03,102 ; 74.205,103.8 74.48,103.8 74.48,102 ; 75.36,102.6 76.185,102.6 76.46,102.75 76.46,102.9 76.185,103.05 75.635,103.05 75.36,102.75 75.36,102.3 75.635,102 76.185,102 76.46,102.15 ; 78.22,102 78.22,103.8 79.32,102 79.32,103.8 ; 79.65,103.05 79.65,102.3 79.925,102 80.475,102 80.75,102.3 ; 80.75,102 80.75,103.05 ; 81.08,103.05 81.63,103.05 ; 81.08,103.8 81.08,102.3 81.355,102 82.18,102 ; 82.51,103.05 83.61,103.05 82.51,102 83.61,102 ; 83.94,103.05 83.94,102.3 84.215,102 84.765,102 85.04,102.3 ; 85.04,102 85.04,103.05 ; 85.37,102 85.37,103.05 ; 85.37,102.75 85.645,103.05 86.195,103.05 86.47,102.75 86.47,102 ; 86.8,101.4 87.625,101.4 87.9,101.7 87.9,102.75 87.625,103.05 87.075,103.05 86.8,102.75 86.8,102.3 87.075,102 87.625,102 87.9,102.3 ; 89.66,102 90.76,102 ; 89.797,103.05 90.21,103.05 90.21,102 ; 90.21,103.65 90.21,103.8 ; 91.09,102 92.052,102 92.19,102.3 92.052,102.6 91.227,102.6 91.09,102.9 91.227,103.05 92.19,103.05 ; 92.52,103.05 93.07,103.05 ; 92.52,103.8 92.52,102.3 92.795,102 93.62,102 ; 95.38,102 96.342,102 96.48,102.3 96.342,102.6 95.517,102.6 95.38,102.9 95.517,103.05 96.48,103.05 ; 96.81,103.05 97.36,103.05 ; 96.81,103.8 96.81,102.3 97.085,102 97.91,102 ; 98.24,102 98.24,103.05 ; 98.24,102.6 98.652,103.05 99.34,103.05 ; 100.77,102 100.77,102.75 100.495,103.05 99.945,103.05 99.67,102.75 99.67,102.3 99.945,102 100.495,102 100.77,102.3 ; 101.1,101.4 101.1,103.5 101.375,103.8 102.2,103.8 ; 101.1,102.6 101.65,102.6 ; 102.53,103.05 103.355,103.05 103.63,102.75 103.63,102.3 103.355,102 102.53,102 102.53,103.8 ; 105.06,102 105.06,102.75 104.785,103.05 104.235,103.05 103.96,102.75 103.96,102.3 104.235,102 104.785,102 105.06,102.3 ; 105.39,102 105.39,103.05 ; 105.39,102.6 105.802,103.05 106.49,103.05 ; 18.16,102.3 18.435,102 18.985,102 19.26,102.3 19.26,102.75 18.985,103.05 18.435,103.05 18.16,102.75 18.16,102.3 ; 28.17,102.3 28.445,102 28.995,102 29.27,102.3 29.27,102.75 28.995,103.05 28.445,103.05 28.17,102.75 28.17,102.3 ; 53.91,102.3 54.185,102 54.735,102 55.01,102.3 55.01,102.75 54.735,103.05 54.185,103.05 53.91,102.75 53.91,102.3 ; 57.045,102 57.182,102 57.182,102.15 57.045,102.15 57.045,102 ; 57.045,102.75 57.182,102.75 57.182,102.9 57.045,102.9 57.045,102.75 ; 61.06,102.3 61.335,102 61.885,102 62.16,102.3 62.16,102.75 61.885,103.05 61.335,103.05 61.06,102.75 61.06,102.3 ; 107.232,103.5 107.37,102.6 107.507,102.6 107.645,103.5 107.507,103.8 107.37,103.8 107.232,103.5 ; 107.37,102 107.507,102 107.507,102.15 107.37,102.15 107.37,102
  Top Layer w0.3: 3.696,49.212 3.696,55.245 3.696,59.055 18.605,59.055 ; 5.829,49.212 9.877,49.212 ; 5.829,55.245 9.877,55.245 ; 10.76,13.97 31.115,13.97 31.115,25.4 32.588,25.4 ; 10.76,16.192 28.892,16.192 28.892,27.94 32.588,27.94 ; 10.76,18.415 26.67,18.415 26.67,30.48 32.588,30.48 ; 11.712,49.212 24.765,49.212 ; 11.712,55.245 21.145,55.245 21.145,59.055 ; 34.074,39.37 34.074,36.83 34.074,34.29 24.765,34.29 ; 34.722,25.4 38.735,25.4 ; 34.722,27.94 38.735,27.94 ; 34.722,30.48 38.735,30.48 ; 35.141,34.29 40.005,34.29 41.275,35.56 42.227,34.608 45.187,34.608 ; 35.141,36.83 40.005,36.83 41.275,38.1 42.545,36.83 43.18,36.83 43.497,36.512 45.187,36.512 ; 35.141,39.37 35.877,39.37 37.148,38.1 38.735,38.1 40.005,39.37 42.545,39.37 43.497,38.417 45.187,38.417 ; 38.417,79.261 38.417,71.438 46.355,63.5 ; 38.417,81.394 38.417,94.897 42.545,94.897 ; 38.735,40.64 40.005,41.91 43.18,41.91 43.497,42.227 45.187,42.227 ; 38.735,48.26 40.005,46.99 42.227,46.99 43.497,45.72 45.187,45.72 ; 38.735,50.8 40.005,49.53 45.187,49.53 ; 38.735,55.88 24.765,55.88 24.765,49.212 ; 40.64,79.261 40.64,71.438 47.625,64.453 47.625,62.23 46.355,60.96 46.253,60.96 46.253,51.435 46.253,49.53 46.253,47.625 46.253,45.72 ; 40.64,81.394 40.64,90.452 42.545,90.452 ; 41.275,25.4 45.187,25.4 ; 41.275,27.94 45.187,27.94 ; 41.275,40.64 43.18,40.64 43.497,40.322 45.187,40.322 ; 41.275,48.26 42.862,48.26 43.497,47.625 45.187,47.625 ; 41.275,50.8 42.862,50.8 43.497,51.435 45.187,51.435 ; 42.545,93.062 44.167,93.062 45.085,93.98 ; 42.862,79.261 42.862,71.438 48.895,65.405 48.895,63.5 ; 42.862,81.394 42.862,85.725 46.002,85.725 46.002,87.312 ; 44.167,87.312 42.545,87.312 42.545,88.617 44.167,88.617 45.085,89.535 ; 44.167,91.757 44.167,90.452 45.085,89.535 ; 44.167,96.203 44.167,94.897 45.085,93.98 ; 45.085,79.261 45.085,70.802 50.165,65.722 50.165,62.23 48.895,60.96 48.895,42.227 46.253,42.227 46.253,40.322 46.253,38.417 46.253,36.512 ; 45.085,81.394 45.085,84.772 49.212,84.772 49.212,90.452 47.625,90.452 ; 46.002,91.757 49.847,91.757 49.847,84.138 47.307,84.138 47.307,81.394 ; 46.002,96.203 51.752,96.203 51.752,81.394 ; 46.253,25.4 46.253,27.94 46.253,34.608 51.435,34.608 51.435,60.96 52.705,62.23 52.705,66.675 49.53,69.85 49.53,79.261 ; 46.355,17.815 46.355,17.78 38.417,17.78 38.417,12.383 8.925,12.383 8.925,13.97 8.925,16.192 8.925,18.415 8.925,20.002 24.765,20.002 24.765,34.29 ; 47.307,79.261 47.307,70.168 51.435,66.04 51.435,63.5 ; 47.625,88.617 46.002,88.617 45.085,89.535 ; 47.625,93.062 46.002,93.062 45.085,93.98 ; 47.625,94.897 50.482,94.897 50.482,83.502 49.53,83.502 49.53,81.394 ; 49.53,24.549 49.53,21.907 50.165,21.273 50.165,16.51 51.435,15.24 ; 49.53,25.616 51.435,25.616 53.34,25.616 ; 51.435,17.78 51.435,24.549 ; 51.752,79.261 51.752,69.532 53.975,67.31 53.975,63.5 ; 53.34,24.549 53.34,21.59 53.975,20.955 53.975,17.78 ; 53.657,79.261 53.657,69.215 55.245,67.627 55.245,62.23 53.975,60.96 53.975,58.102 53.34,57.468 53.34,25.616 ; 53.657,81.394 53.657,94.897 57.785,94.897 ; 53.975,15.24 55.245,16.51 55.245,24.549 ; 55.245,25.616 53.34,25.616 ; 55.88,79.261 55.88,68.263 56.515,67.627 56.515,63.5 ; 55.88,81.394 55.88,90.452 57.785,90.452 ; 56.515,15.24 57.785,16.51 57.785,25.082 58.42,25.717 58.42,27.407 ; 56.515,17.78 56.515,27.407 ; 57.785,9.525 70.383,9.525 70.485,9.627 73.025,9.627 75.565,9.627 ; 57.785,93.062 59.407,93.062 60.325,93.98 ; 58.102,79.261 57.785,78.943 57.785,62.23 56.515,60.96 56.515,28.473 58.42,28.473 60.325,28.473 62.23,28.473 ; 58.102,81.394 58.102,85.725 61.242,85.725 61.242,87.312 ; 59.055,15.24 60.325,16.51 60.325,24.447 62.23,26.352 62.23,27.407 ; 59.055,17.78 59.055,24.447 60.325,25.717 60.325,27.407 ; 59.055,63.5 59.055,74.93 60.325,76.2 60.325,79.261 ; 59.407,87.312 57.785,87.312 57.785,88.617 59.407,88.617 60.325,89.535 ; 59.407,91.757 59.407,90.452 60.325,89.535 ; 59.407,96.203 59.407,94.897 60.325,93.98 ; 60.325,6.35 78.74,6.35 78.74,7.62 ; 60.325,81.394 60.325,84.772 64.453,84.772 64.453,90.452 62.865,90.452 ; 61.242,91.757 65.087,91.757 65.087,84.138 62.547,84.138 62.547,81.394 ; 61.242,96.203 66.992,96.203 66.992,81.394 ; 61.595,15.24 62.865,16.51 62.865,20.32 63.5,20.955 63.5,22.327 ; 61.595,17.78 61.595,22.327 ; 61.595,23.393 63.5,23.393 ; 61.595,63.5 61.595,75.248 64.77,78.422 64.77,79.261 ; 62.547,79.261 62.547,77.47 60.325,75.248 60.325,62.23 59.055,60.96 59.055,32.067 63.5,32.067 63.5,23.393 ; 62.865,88.617 61.242,88.617 60.325,89.535 ; 62.865,93.062 61.242,93.062 60.325,93.98 ; 62.865,94.897 65.722,94.897 65.722,83.502 64.77,83.502 64.77,81.394 ; 64.135,15.24 65.405,16.51 65.405,20.32 66.04,20.955 67.31,20.955 67.31,22.327 ; 64.135,17.78 64.135,20.002 65.405,21.273 65.405,22.327 ; 64.135,60.96 65.405,62.23 65.405,71.438 71.438,77.47 71.438,79.261 ; 64.135,63.5 64.135,72.707 69.215,77.787 69.215,79.261 ; 66.675,15.24 67.945,16.51 67.945,19.367 70.485,21.907 70.485,25.502 ; 66.675,17.78 66.675,19.367 68.58,21.273 68.58,25.502 ; 66.675,60.96 67.945,62.23 67.945,69.85 75.882,77.787 75.882,79.261 ; 66.675,63.5 66.675,70.485 73.66,77.47 73.66,79.261 ; 66.992,79.261 66.992,77.787 66.04,76.835 65.087,76.835 62.865,74.612 62.865,62.23 61.595,60.96 61.595,33.655 68.58,33.655 68.58,26.568 70.485,26.568 72.39,26.568 74.295,26.568 ; 67.31,23.393 65.405,23.393 63.5,23.393 ; 69.215,15.24 70.485,16.51 70.485,19.685 74.295,23.495 74.295,25.502 ; 69.215,17.78 69.215,19.367 72.39,22.543 72.39,25.502 ; 69.215,63.5 69.215,68.58 78.105,77.47 78.105,79.261 ; 69.215,81.394 69.215,94.897 73.343,94.897 ; 70.485,10.693 70.485,11.747 71.755,13.018 71.755,15.24 ; 71.438,81.394 71.438,90.452 73.343,90.452 ; 71.755,17.78 73.025,16.51 73.025,10.693 ; 71.755,63.5 71.755,66.04 82.55,76.835 82.55,79.261 ; 73.343,93.062 74.965,93.062 75.882,93.98 ; 73.66,81.394 73.66,85.725 76.8,85.725 76.8,87.312 ; 74.295,7.62 75.984,7.62 ; 74.295,17.78 75.565,16.51 75.565,10.693 ; 74.295,63.5 74.295,64.77 86.995,77.47 86.995,79.261 ; 74.397,30.162 74.397,32.067 74.397,33.972 74.397,35.877 71.755,35.877 71.755,60.96 73.025,62.23 73.025,65.087 84.772,76.835 84.772,79.261 ; 74.397,37.782 74.397,39.688 74.397,41.593 74.397,43.497 72.707,43.497 72.707,54.927 74.295,54.927 74.295,60.96 75.565,62.23 75.565,64.77 89.218,78.422 89.218,79.261 ; 74.397,45.402 74.397,47.307 74.397,49.212 74.397,51.117 74.397,53.34 81.915,53.34 ; 74.965,87.312 73.343,87.312 73.343,88.617 74.965,88.617 75.882,89.535 ; 74.965,91.757 74.965,90.452 75.882,89.535 ; 74.965,96.203 74.965,94.897 75.882,93.98 ; 75.463,30.162 79.692,30.162 81.28,31.75 85.725,31.75 86.995,30.48 ; 75.463,32.067 79.375,32.067 80.328,33.02 84.455,33.02 ; 75.463,33.972 79.375,33.972 79.692,34.29 85.725,34.29 86.995,33.02 ; 75.463,35.877 77.47,35.877 77.787,35.56 84.455,35.56 ; 75.463,37.782 76.835,37.782 77.787,36.83 85.725,36.83 86.995,35.56 ; 75.463,39.688 76.517,39.688 78.105,38.1 84.455,38.1 ; 75.463,41.593 76.517,41.593 78.74,39.37 85.725,39.37 86.995,38.1 92.494,38.1 ; 75.463,43.497 76.2,43.497 79.057,40.64 84.455,40.64 ; 75.463,45.402 76.835,45.402 80.328,41.91 85.725,41.91 86.995,40.64 92.494,40.64 ; 75.463,47.307 76.835,47.307 80.962,43.18 84.455,43.18 ; 75.463,49.212 76.517,49.212 81.28,44.45 85.725,44.45 86.995,43.18 ; 75.463,51.117 76.835,51.117 82.233,45.72 84.455,45.72 ; 75.882,81.394 75.882,84.772 80.01,84.772 80.01,90.452 78.422,90.452 ; 76.8,91.757 80.645,91.757 80.645,84.138 78.105,84.138 78.105,81.394 ; 76.8,96.203 82.55,96.203 82.55,81.394 ; 76.835,15.24 76.835,11.011 78.74,11.011 ; 76.835,17.78 78.105,16.51 78.105,14.287 80.645,11.747 80.645,11.011 ; 76.937,22.225 76.937,24.13 76.937,26.035 76.937,27.94 69.215,27.94 69.215,60.96 70.485,62.23 70.485,67.31 80.328,77.153 80.328,79.261 ; 77.051,7.62 78.74,7.62 ; 78.003,22.225 80.962,22.225 82.867,24.13 85.725,24.13 86.995,25.4 ; 78.003,24.13 80.645,24.13 83.185,26.67 85.725,26.67 86.995,27.94 ; 78.003,26.035 80.645,26.035 82.55,27.94 84.455,27.94 ; 78.003,27.94 80.01,27.94 82.55,30.48 84.455,30.48 ; 78.422,88.617 76.8,88.617 75.882,89.535 ; 78.422,93.062 76.8,93.062 75.882,93.98 ; 78.422,94.897 81.28,94.897 81.28,83.502 80.328,83.502 80.328,81.394 ; 79.375,60.96 79.375,63.5 ; 80.645,9.944 78.74,9.944 78.74,7.62 ; 84.455,22.86 84.455,19.685 93.561,19.685 93.561,38.1 93.561,40.64 93.561,42.545 93.561,44.45 ; 84.455,50.8 85.725,49.53 88.582,49.53 89.852,50.8 89.852,71.12 95.885,77.153 95.885,79.261 ; 84.455,53.34 81.915,53.34 ; 84.772,81.394 84.772,94.897 88.9,94.897 ; 86.995,48.26 89.852,48.26 93.98,52.387 93.98,72.707 98.108,76.835 98.108,79.261 ; 86.995,50.8 85.725,52.07 85.725,68.263 93.662,76.2 93.662,79.261 ; 86.995,81.394 86.995,90.452 88.9,90.452 ; 88.9,93.062 90.522,93.062 91.44,93.98 ; 89.218,81.394 89.218,85.725 92.357,85.725 92.357,87.312 ; 90.17,41.91 90.805,42.545 92.494,42.545 ; 90.17,44.45 92.494,44.45 ; 90.522,87.312 88.9,87.312 88.9,88.617 90.522,88.617 91.44,89.535 ; 90.522,91.757 90.522,90.452 91.44,89.535 ; 90.522,96.203 90.522,94.897 91.44,93.98 ; 91.44,79.261 91.44,77.153 81.915,67.627 81.915,53.34 ; 91.44,81.394 91.44,84.772 95.567,84.772 95.567,90.452 93.98,90.452 ; 92.357,91.757 96.203,91.757 96.203,84.138 93.662,84.138 93.662,81.394 ; 92.357,96.203 98.108,96.203 98.108,81.394 ; 93.98,88.617 92.357,88.617 91.44,89.535 ; 93.98,93.062 92.357,93.062 91.44,93.98 ; 93.98,94.897 96.837,94.897 96.837,83.502 95.885,83.502 95.885,81.394 ; 24.765,34.29 24.765,49.212
  Bottom Layer w0.165: 1,102 1,103.2 1.55,103.8 2.1,103.2 2.1,102 ; 1,102.6 2.1,102.6 ; 2.43,102 2.43,103.8 ; 2.43,102.6 3.255,103.5 ; 2.842,103.05 3.53,102 ; 3.86,103.05 4.41,103.05 ; 3.86,103.8 3.86,102.3 4.135,102 4.96,102 ; 5.29,103.05 5.29,102.3 5.565,102 6.115,102 6.39,102.3 ; 6.39,102 6.39,103.05 ; 6.72,102.6 7.545,102.6 7.82,102.75 7.82,102.9 7.545,103.05 6.995,103.05 6.72,102.75 6.72,102.3 6.995,102 7.545,102 7.82,102.15 ; 8.15,102 9.25,102 ; 8.425,103.8 8.7,103.8 8.7,102 ; 9.58,102 10.68,102 ; 9.855,103.8 10.13,103.8 10.13,102 ; 11.01,102.6 11.835,102.6 12.11,102.75 12.11,102.9 11.835,103.05 11.285,103.05 11.01,102.75 11.01,102.3 11.285,102 11.835,102 12.11,102.15 ; 12.44,102 13.402,102 13.54,102.3 13.402,102.6 12.577,102.6 12.44,102.9 12.577,103.05 13.54,103.05 ; 15.3,102 15.3,103.8 15.987,103.8 16.262,103.65 16.4,103.35 16.262,103.05 15.987,102.9 15.3,102.9 ; 16.73,102 16.73,103.05 ; 16.73,102.6 17.142,103.05 17.83,103.05 ; 19.59,101.4 20.415,101.4 20.69,101.7 20.69,103.05 20.277,103.05 ; 20.69,103.65 20.69,103.8 ; 21.02,102.6 21.845,102.6 22.12,102.75 22.12,102.9 21.845,103.05 21.295,103.05 21.02,102.75 21.02,102.3 21.295,102 21.845,102 22.12,102.15 ; 22.45,102 22.45,103.8 ; 22.45,102.6 23.275,103.5 ; 22.862,103.05 23.55,102 ; 23.88,103.05 24.43,103.05 ; 23.88,103.8 23.88,102.3 24.155,102 24.98,102 ; 26.74,103.05 27.29,102 27.84,103.05 ; 29.6,102 29.6,103.05 ; 29.6,102.75 29.875,103.05 30.425,103.05 30.7,102.75 30.7,102 ; 32.46,103.8 33.56,103.8 ; 33.01,102 33.01,103.8 ; 33.89,102 33.89,103.2 34.44,103.8 34.99,103.2 34.99,102 ; 33.89,102.6 34.99,102.6 ; 35.32,102 35.32,103.8 36.007,103.8 36.282,103.65 36.42,103.35 36.282,103.05 36.007,102.9 35.32,102.9 ; 35.87,102.9 36.42,102 ; 37.575,102.9 37.85,102.9 37.85,102.45 37.712,102.15 37.437,102 37.162,102 36.887,102.15 36.75,102.45 36.75,103.35 36.887,103.65 37.162,103.8 37.437,103.8 37.712,103.65 ; 38.18,102.9 38.73,102.9 ; 39.28,102 38.18,102 38.18,103.8 39.28,103.8 ; 39.61,103.8 40.71,103.8 ; 40.16,102 40.16,103.8 ; 42.47,102 42.47,103.8 43.57,102 43.57,103.8 ; 45,102.45 44.862,102.15 44.587,102 44.312,102 44.037,102.15 43.9,102.45 43.9,103.35 44.037,103.65 44.312,103.8 44.587,103.8 44.862,103.65 45,103.35 ; 45.33,102.9 46.43,102.9 ; 46.76,102.9 47.31,102.9 ; 47.86,102 46.76,102 46.76,103.8 47.86,103.8 ; 49.29,103.05 48.465,103.05 48.19,102.75 48.19,102.3 48.465,102 49.29,102 49.29,103.8 ; 49.62,102 50.72,102 ; 49.757,103.05 50.17,103.05 50.17,102 ; 50.17,103.65 50.17,103.8 ; 51.05,103.05 51.6,103.05 ; 51.05,103.8 51.05,102.3 51.325,102 52.15,102 ; 52.48,102 53.58,102 ; 52.617,103.05 53.03,103.05 53.03,102 ; 53.03,103.65 53.03,103.8 ; 55.34,102 55.34,103.05 ; 55.34,102.75 55.615,103.05 56.165,103.05 56.44,102.75 56.44,102 ; 59.63,102 59.63,103.8 ; 59.63,102.6 60.73,103.8 ; 60.042,103.05 60.73,102 ; 62.49,102 62.49,103.05 63.315,103.05 63.59,102.75 63.59,102 ; 62.765,103.05 63.04,102.75 63.04,102 ; 63.92,102 63.92,103.05 64.745,103.05 65.02,102.75 65.02,102 ; 64.195,103.05 64.47,102.75 64.47,102 ; 65.35,102.6 66.175,102.6 66.45,102.75 66.45,102.9 66.175,103.05 65.625,103.05 65.35,102.75 65.35,102.3 65.625,102 66.175,102 66.45,102.15 ; 66.78,102 66.78,103.05 ; 66.78,102.6 67.192,103.05 67.88,103.05 ; 68.21,103.05 69.31,103.05 68.21,102 69.31,102 ; 69.64,102 70.74,102 ; 69.777,103.05 70.19,103.05 70.19,102 ; 70.19,103.65 70.19,103.8 ; 71.07,102.6 71.895,102.6 72.17,102.75 72.17,102.9 71.895,103.05 71.345,103.05 71.07,102.75 71.07,102.3 71.345,102 71.895,102 72.17,102.15 ; 72.5,102 73.6,102 ; 72.775,103.8 73.05,103.8 73.05,102 ; 73.93,102 75.03,102 ; 74.205,103.8 74.48,103.8 74.48,102 ; 75.36,102.6 76.185,102.6 76.46,102.75 76.46,102.9 76.185,103.05 75.635,103.05 75.36,102.75 75.36,102.3 75.635,102 76.185,102 76.46,102.15 ; 78.22,102 78.22,103.8 79.32,102 79.32,103.8 ; 79.65,103.05 79.65,102.3 79.925,102 80.475,102 80.75,102.3 ; 80.75,102 80.75,103.05 ; 81.08,103.05 81.63,103.05 ; 81.08,103.8 81.08,102.3 81.355,102 82.18,102 ; 82.51,103.05 83.61,103.05 82.51,102 83.61,102 ; 83.94,103.05 83.94,102.3 84.215,102 84.765,102 85.04,102.3 ; 85.04,102 85.04,103.05 ; 85.37,102 85.37,103.05 ; 85.37,102.75 85.645,103.05 86.195,103.05 86.47,102.75 86.47,102 ; 86.8,101.4 87.625,101.4 87.9,101.7 87.9,102.75 87.625,103.05 87.075,103.05 86.8,102.75 86.8,102.3 87.075,102 87.625,102 87.9,102.3 ; 89.66,102 90.76,102 ; 89.797,103.05 90.21,103.05 90.21,102 ; 90.21,103.65 90.21,103.8 ; 91.09,102 92.052,102 92.19,102.3 92.052,102.6 91.227,102.6 91.09,102.9 91.227,103.05 92.19,103.05 ; 92.52,103.05 93.07,103.05 ; 92.52,103.8 92.52,102.3 92.795,102 93.62,102 ; 95.38,102 96.342,102 96.48,102.3 96.342,102.6 95.517,102.6 95.38,102.9 95.517,103.05 96.48,103.05 ; 96.81,103.05 97.36,103.05 ; 96.81,103.8 96.81,102.3 97.085,102 97.91,102 ; 98.24,102 98.24,103.05 ; 98.24,102.6 98.652,103.05 99.34,103.05 ; 100.77,102 100.77,102.75 100.495,103.05 99.945,103.05 99.67,102.75 99.67,102.3 99.945,102 100.495,102 100.77,102.3 ; 101.1,101.4 101.1,103.5 101.375,103.8 102.2,103.8 ; 101.1,102.6 101.65,102.6 ; 102.53,103.05 103.355,103.05 103.63,102.75 103.63,102.3 103.355,102 102.53,102 102.53,103.8 ; 105.06,102 105.06,102.75 104.785,103.05 104.235,103.05 103.96,102.75 103.96,102.3 104.235,102 104.785,102 105.06,102.3 ; 105.39,102 105.39,103.05 ; 105.39,102.6 105.802,103.05 106.49,103.05 ; 18.16,102.3 18.435,102 18.985,102 19.26,102.3 19.26,102.75 18.985,103.05 18.435,103.05 18.16,102.75 18.16,102.3 ; 28.17,102.3 28.445,102 28.995,102 29.27,102.3 29.27,102.75 28.995,103.05 28.445,103.05 28.17,102.75 28.17,102.3 ; 53.91,102.3 54.185,102 54.735,102 55.01,102.3 55.01,102.75 54.735,103.05 54.185,103.05 53.91,102.75 53.91,102.3 ; 57.045,102 57.182,102 57.182,102.15 57.045,102.15 57.045,102 ; 57.045,102.75 57.182,102.75 57.182,102.9 57.045,102.9 57.045,102.75 ; 61.06,102.3 61.335,102 61.885,102 62.16,102.3 62.16,102.75 61.885,103.05 61.335,103.05 61.06,102.75 61.06,102.3 ; 107.232,103.5 107.37,102.6 107.507,102.6 107.645,103.5 107.507,103.8 107.37,103.8 107.232,103.5 ; 107.37,102 107.507,102 107.507,102.15 107.37,102.15 107.37,102
  Bottom Layer w0.3: 6.032,71.12 7.302,72.39 24.447,72.39 24.447,34.29 19.685,34.29 18.415,35.56 ; 6.032,73.66 7.302,74.93 26.67,74.93 26.67,31.75 19.685,31.75 18.415,33.02 ; 6.032,76.2 7.302,77.47 28.575,77.47 28.575,29.21 19.685,29.21 18.415,30.48 ; 6.032,78.74 7.302,80.01 30.795,80.01 30.795,26.67 19.685,26.67 18.415,27.94 ; 6.032,81.28 7.62,82.867 32.703,82.867 32.703,21.59 18.415,21.59 18.415,25.4 ; 8.572,71.12 23.495,71.12 23.495,35.56 20.955,35.56 ; 8.572,73.66 25.4,73.66 25.4,33.02 20.955,33.02 ; 8.572,76.2 27.622,76.2 27.622,30.48 20.955,30.48 ; 8.572,78.74 29.527,78.74 29.527,27.94 20.955,27.94 ; 8.572,81.28 31.75,81.28 31.75,22.86 20.955,22.86 20.955,25.4 ; 18.605,59.055 13.652,59.055 13.652,15.557 40.322,15.557 ; 38.735,53.34 41.275,53.34 43.497,53.34 43.497,67.31 76.835,67.31 76.835,63.5 ; 38.735,55.88 41.275,55.88 41.275,89.535 45.085,89.535 ; 45.085,93.98 45.085,89.535 ; 48.895,17.78 48.895,20.637 40.322,20.637 40.322,15.557 ; 57.785,9.525 57.785,21.59 64.135,27.94 64.135,60.96 ; 60.325,6.35 60.325,20.955 66.675,27.305 66.675,60.96 ; 60.325,93.98 60.325,89.535 ; 74.295,7.62 74.295,15.24 ; 75.882,93.98 75.882,89.535 ; 76.835,60.96 76.835,63.5 ; 79.375,60.96 79.375,19.685 84.455,19.685 84.455,22.86 ; 79.375,63.5 79.375,86.042 75.882,89.535 ; 84.455,25.4 85.725,24.13 90.805,24.13 ; 84.455,40.64 85.725,41.91 90.17,41.91 ; 84.455,43.18 85.725,44.45 90.17,44.45 ; 91.44,93.98 91.44,89.535 75.882,89.535 ; 40.322,15.557 40.322,4.445 90.805,4.445 90.805,24.13 ; 45.085,89.535 60.325,89.535 ; 60.325,89.535 75.882,89.535 ; 76.835,63.5 78.105,62.23 95.25,62.23 95.25,28.575 90.805,24.13

## Keep-outs
Keep-Out Layer:
  lines w0.3: 100,0 0,0 0,100 100,100 ; 100,0.15 100,100.15

## Silkscreen, mask and mechanical layers (free items; w line width, h text height)
Top Overlay:
  drawing of 5351 lines, arcs and shapes, not listed
Top Paste:
  drawing of 368 lines, arcs and shapes, not listed
Top Solder:
  drawing of 368 lines, arcs and shapes, not listed
Bottom Solder:
  drawing of 368 lines, arcs and shapes, not listed